# Altium PCB RF-UNIT-QRP_20W.PcbDoc (part 1 of 3)
Units mm, origin at the board's own origin, x right, y up, seen from the top; angles counter-clockwise.
Board outline 187 x 77 mm, 2 copper layers (Top Layer, Top, Bottom Layer, Bottom); 256 components, 173 nets, 766 pads, 3837 vias.
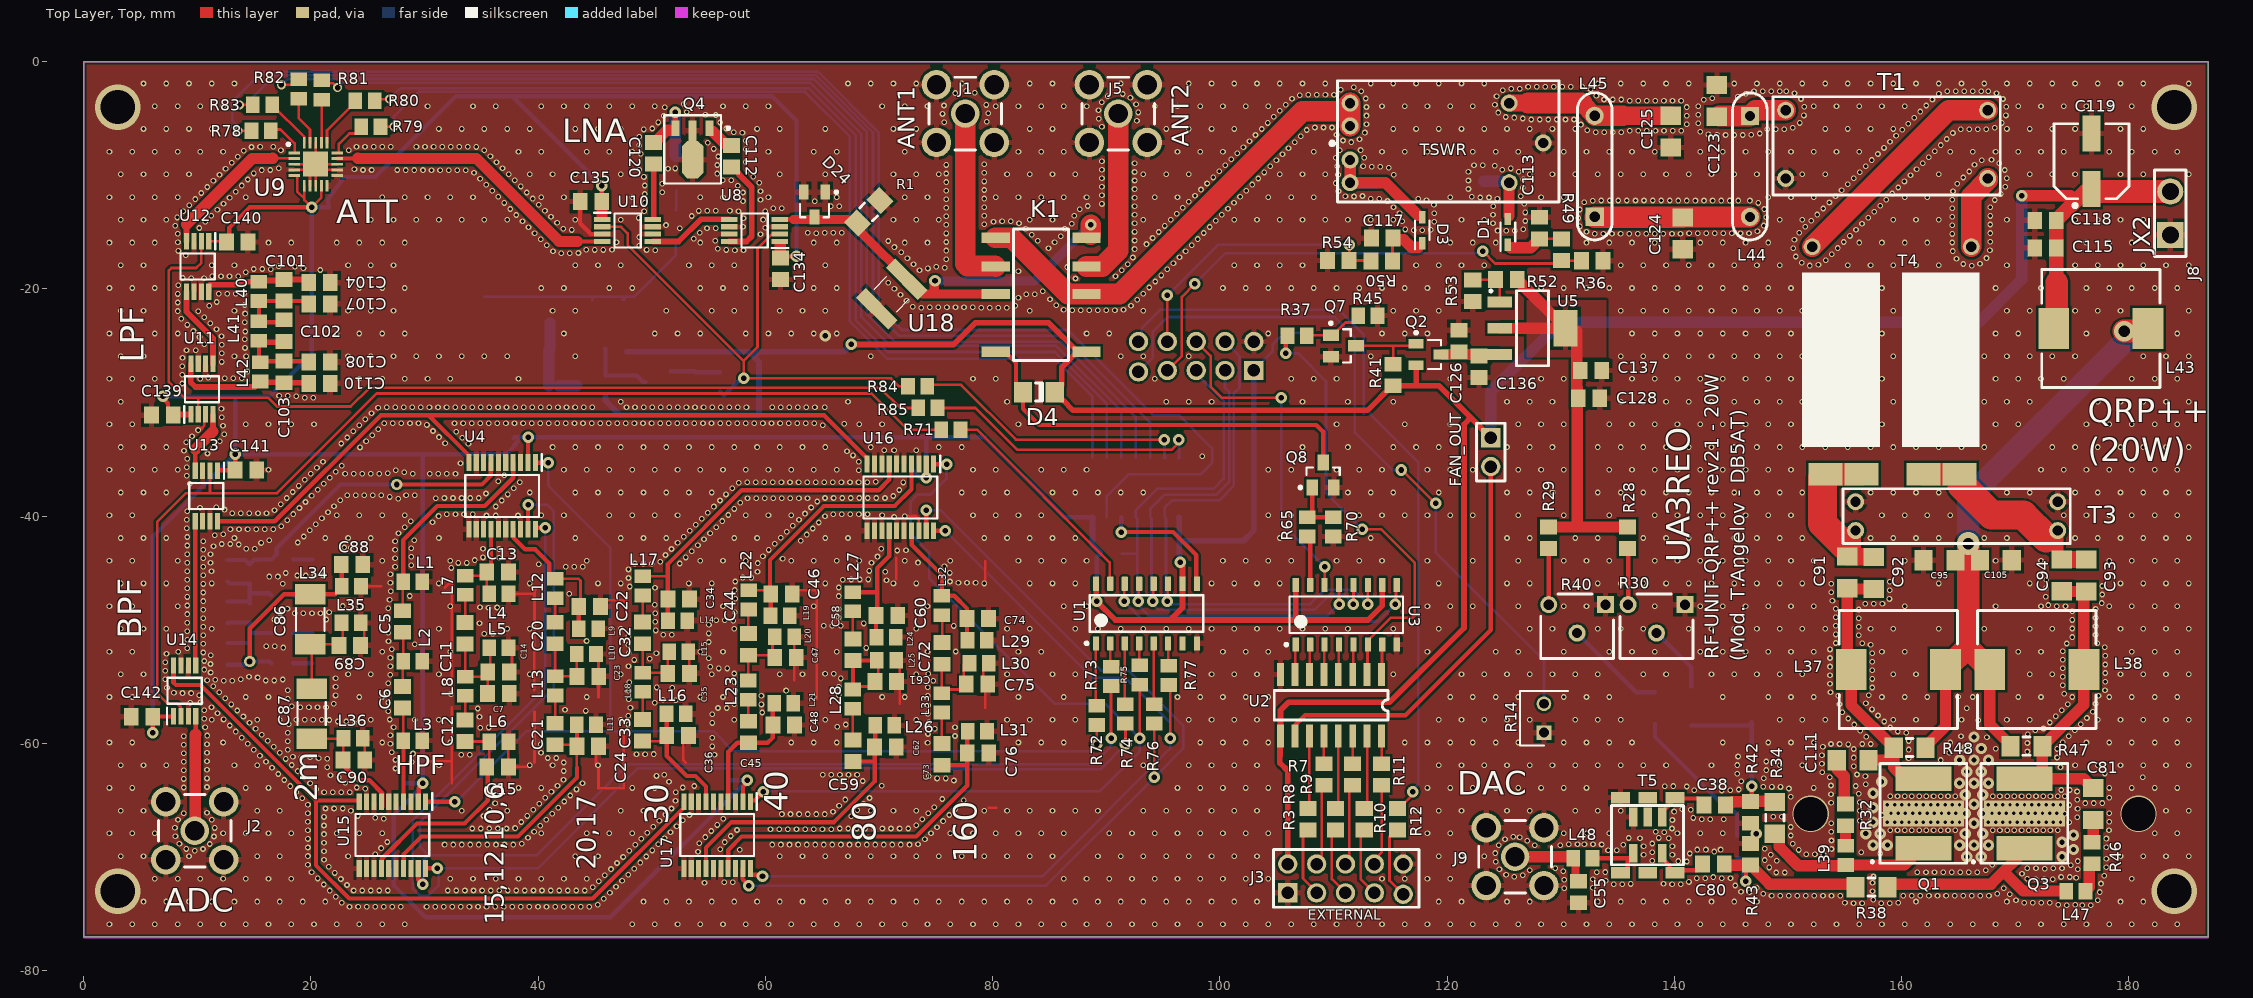
[diagram p0: Top Layer, Top view]
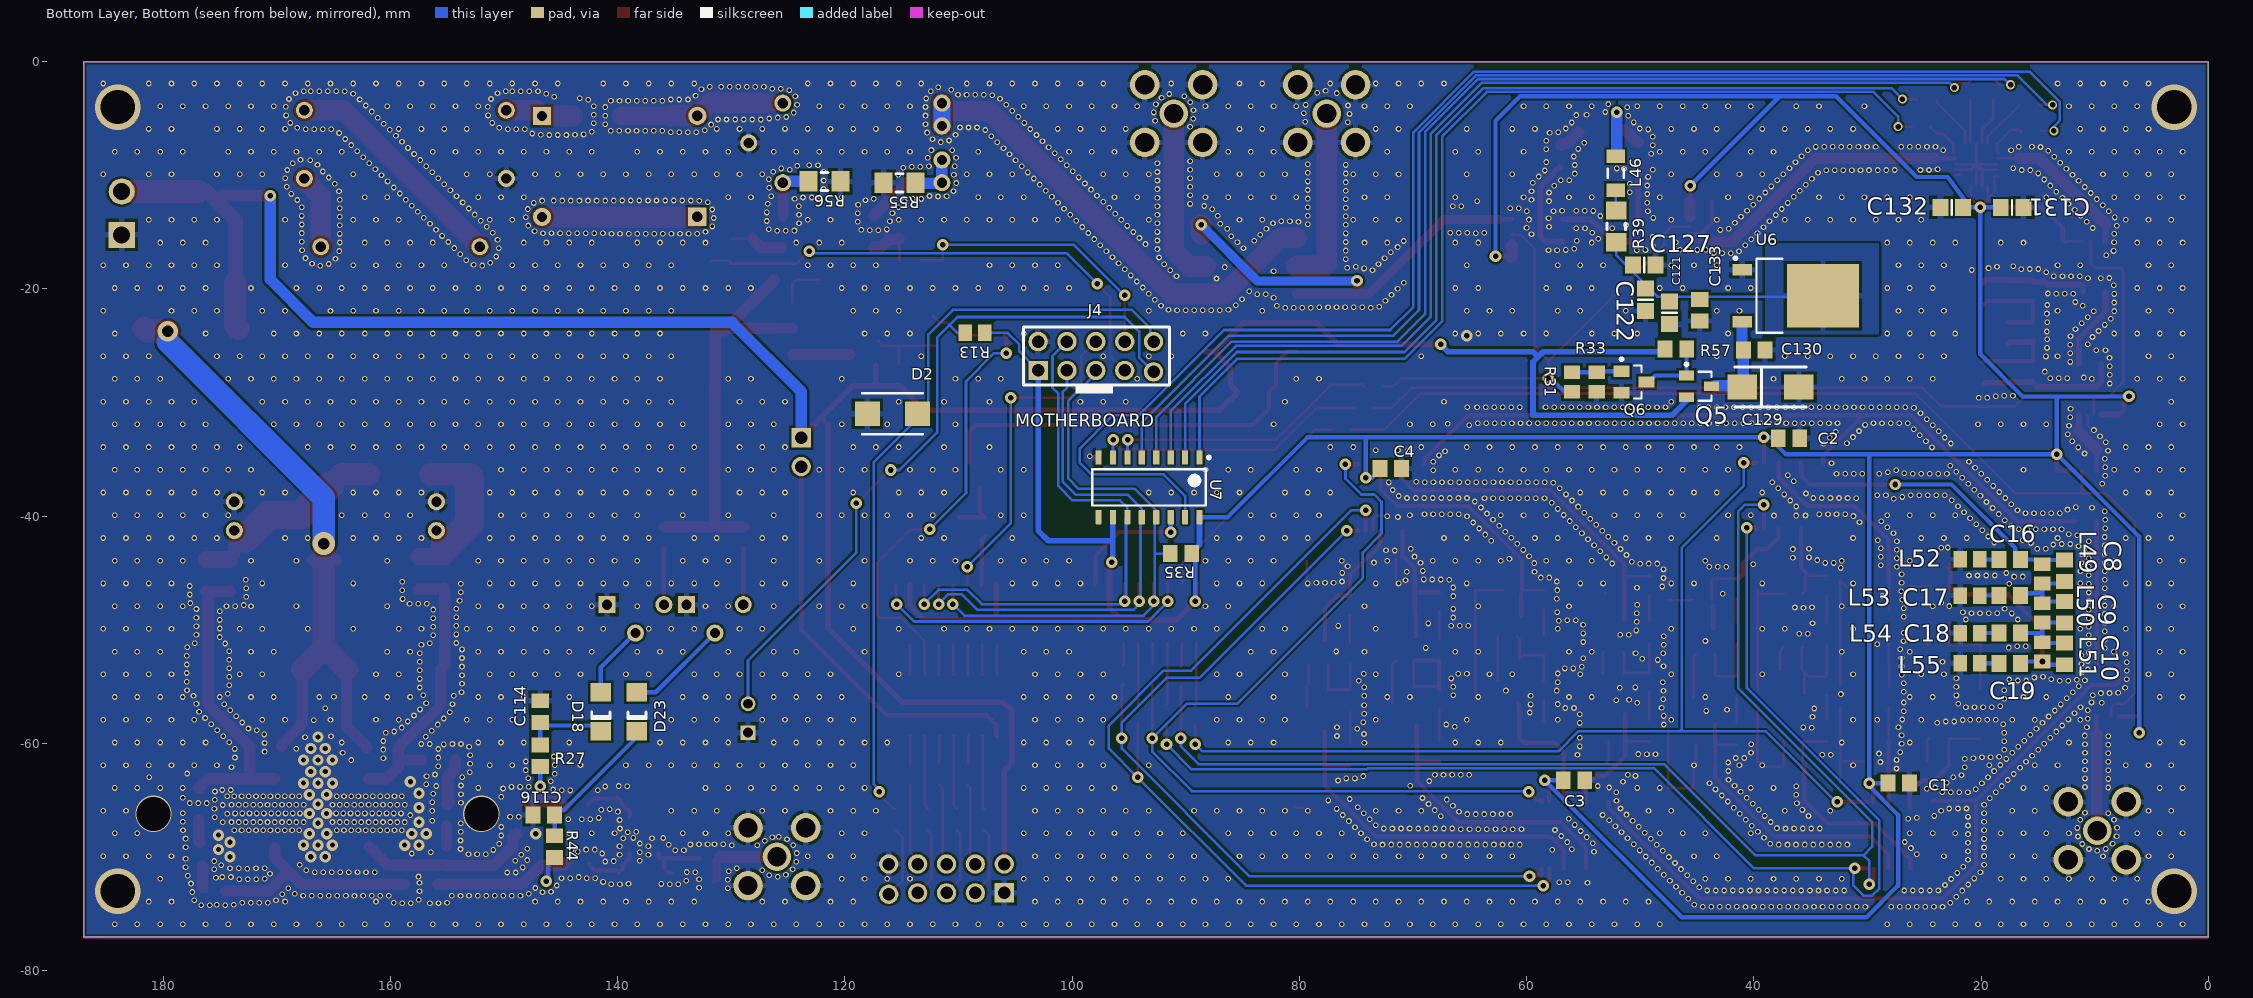
[diagram p1: Bottom Layer, Bottom view, seen from below]

## Layer stack, top to bottom
Top Solder, Top Mask: solder mask 0.0102, Solder Resist, Dk 3.5
Top Layer, Top: signal copper 0.0356
Dielectric 1: dielectric 0.32, FR-4, Dk 4.8
Bottom Layer, Bottom: signal copper 0.0356
Bottom Solder, Bot Mask: solder mask 0.0102, Solder Resist, Dk 3.5

## Board outline
0,-77 187,-77 187,0 0,0

## Design rules (kind name [scope] priority, off if disabled: settings)
BoardOutlineClearance [All] p1: gap=0.2 ignorepadtopadclearanceinfootprint=FALSE except(0.4: Arc-SplitBarrior Arc-SplitContinuation Track-SplitBarrior Track-SplitContinuation SMDPad-SplitBarrior SMDPad-SplitContinuation THPad-SplitBarrior THPad-SplitContinuation Via-SplitBarrior Via-SplitContinuation Fill-SplitBarrior Fill-SplitContinuation Poly-SplitBarrior Poly-SplitContinuation Region-SplitBarrior Region-SplitContinuation Text-SplitBarrior Text-SplitContinuation)
Clearance "Clearance Bottom Layer" [OnLayer('Bottom Layer')] p1: gap=0.203 ignorepadtopadclearanceinfootprint=TRUE except(0.254: Arc-Text Track-Text SMDPad-Text THPad-Text Via-Text Fill-Text Poly-Text Region-Text Text-Text)
Clearance "Clearance Top Layer" [OnLayer('Top Layer')] p2: gap=0.203 ignorepadtopadclearanceinfootprint=TRUE except(0.254: Arc-Text Track-Text SMDPad-Text THPad-Text Via-Text Fill-Text Poly-Text Region-Text Text-Text)
Clearance [All] p3: gap=0.2 ignorepadtopadclearanceinfootprint=FALSE except(0.089: Arc-Arc Arc-Track Arc-SMDPad Track-Track Track-SMDPad SMDPad-SMDPad; 0.127: Arc-Via Track-Via SMDPad-Via THPad-Via Via-Via; 0.254: Arc-Text Track-Text SMDPad-Text THPad-Text Via-Text Fill-Text Poly-Text Region-Text Text-Text)
HoleSize [All] p1: absolutevalues=TRUE maxlimit=6.3 minlimit=0.2 maxpercent=80.000 minpercent=20.000
MinimumAnnularRing [All] p1: minimumring=0.076
MinimumSolderMaskSliver [All] p1: minsoldermaskwidth=0.01
PolygonConnect [HasFootprint('AFT09MS015NT1')] p1: connectstyle=Direct reliefconductorwidth=0.254 reliefentries=4 polygonreliefangle="90 Angle" airgapwidth=0.254
PolygonConnect PolygonConnect_1 [All] p2: thpad.connectstyle=Relief thpad.reliefconductorwidth=0.508 thpad.reliefentries=4 thpad.polygonreliefangle="90 Angle" thpad.airgapwidth=0.254 smdpad.connectstyle=Relief smdpad.reliefconductorwidth=0.508 smdpad.reliefentries=4 smdpad.polygonreliefangle="90 Angle" smdpad.airgapwidth=0.254 via.connectstyle=Direct via.reliefconductorwidth=0.508 via.reliefentries=4 via.polygonreliefangle="90 Angle" via.airgapwidth=0.254
RoutingCorners [All] p1: cornerstyle=Round minsetback=2.54 maxsetback=2.54
RoutingVias [All] p1: holewidth=0.5 width=1 viastyle="Through Hole" minholewidth=0.2 minwidth=0.45 maxholewidth=1 maxwidth=2
SilkToSilkClearance [All] p1: silktosilkclearance=0.01
SilkToSolderMaskClearance [IsPad] p1: minsilkscreentomaskgap=0.01 clearancetoexposedcopper=TRUE
SolderMaskExpansion [All] p1: expansion=0.102 istentingtop=FALSE
Width [All] p1: maxlimit=2.54 minlimit=0.089 preferedwidth=0.381
25 further rules are at their usual default settings.

## Classes and differential pairs
component class "SWR Tandem Match": C113 C117 C123 C124 C125 D1 D3 L44 L45 R36 R49 R50 R54 R55 R56 TSWR
component class RF_AMP: C38 C55 C80 C81 C91 C92 C93 C94 C95 C105 C111 C114 C115 C116 C118 C119 C126 C128 C136 C137 D18 D23 J8 L37 L38 L39 L43 L47 L48 Q1 Q2 Q3 Q7 R27 R28 R29 R30 R32 R34 R37 R38 R40 R41 R42 R43 R44 R45 R46 R47 R48 R52 R53 T1 T3 T4 T5 U5
component class LNA: C101 C102 C103 C104 C107 C108 C110 C112 C120 C121 C122 C127 C129 C130 C131 C132 C133 C134 C135 C139 C140 L40 L41 L42 L46 Q4 Q5 Q6 R31 R33 R39 R57 U6 U8 U9 U10 U11 U12
component class CONTROL: FAN_OUT Q8 R13 R14 R35 R65 R70 R71 R72 R73 R74 R75 R76 R77 R78 R79 R80 R81 R82 R83 R84 R85 U1 U2 U3 U7
component class CONN: D2 D4 D24 J1 J2 J3 J4 J5 J9 K1 R1 R3 R7 R8 R9 R10 R11 R12 U18
component class BPF: C1 C2 C3 C4 C5 C6 C7 C8 C9 C10 C11 C12 C13 C14 C15 C16 C17 C18 C19 C20 C21 C22 C23 C24 C32 C33 C34 C35 C36 C44 C45 C46 C47 C48 C58 C59 C60 C61 C62 C72 C73 C74 C75 C76 C86 C87 C88 C89 C90 C141 C142 L1 L2 L3 L4 L5 L6 L7 L8 L9 L10 L11 L12 L13 L14 L15 L16 L17 L18 L19 L20 L21 L22 L23 L24 L25 L26 L27 L28 L29 L30 L31 L32 L33 L34 L35 L36 L49 L50 L51 L52 L53 L54 L55 U4 U13 U14 U15 U16 U17

## Components (designator, comment, footprint, x,y, rotation, side; value= is the part's Value field where it differs from the comment)
C1 "100n" CAP_0805 27.051,-63.5 r0 bottom
C2 "100n" CAP_0805 36.703,-33.147 r0 bottom
C3 "100n" CAP_0805 55.626,-63.246 r0 bottom
C4 "100n" CAP_0805 71.755,-35.814 r0 bottom
C5 "47p" CAP_0805 28.07,-49.476 r90 top
C6 "33p" CAP_0805 28.07,-56.143 r90 top
C7 "39p" CAP_0805 36.703,-55.626 r180 top
C8 "110p" CAP_0805 12.673,-45.009 r90 bottom
C9 "100p" CAP_0805 12.673,-48.667 r90 bottom
C10 "110p" CAP_0805 12.673,-52.324 r90 bottom
C11 "75p" CAP_0805 33.577,-50.515 r90 top
C12 "61p" CAP_0805 33.577,-59.088 r90 top
C13 "47p" CAP_0805 36.637,-44.915 r180 top
C14 "100p" CAP_0805 36.715,-53.721 r180 top
C15 "120p" CAP_0805 36.637,-62.06 r180 top
C16 "8p" CAP_0805 17.272,-43.815 r0 bottom
C17 "15pF" CAP_0805 17.272,-46.99 r0 bottom
C18 "15p" CAP_0805 17.272,-50.292 r0 bottom
C19 "8p" CAP_0805 17.272,-52.959 r0 bottom
C20 "150p" CAP_0805 41.504,-50.485 r90 top
C21 "120p" CAP_0805 41.504,-59.375 r90 top
C22 "100p" CAP_0805 44.731,-47.943 r180 top
C23 "330p" CAP_0805 44.577,-54.102 r180 top
C24 "270p" CAP_0805 44.564,-60.252 r180 top
C32 "270p" CAP_0805 49.192,-50.479 r90 top
C33 "180p" CAP_0805 49.192,-59.052 r90 top
C34 "180p" CAP_0805 52.57,-47.292 r180 top
C35 "560p" CAP_0805 52.565,-53.85 r180 top
C36 "470p" CAP_0805 52.478,-59.309 r180 top
C38 "100n" CAP_0805 143.764,-65.405 r180 top
C44 "330p" CAP_0805 58.496,-51.49 r90 top
C45 "270p" CAP_0805 58.496,-59.203 r90 top
C46 "330p" CAP_0805 61.622,-46.863 r180 top
C47 "1n" CAP_0805 61.976,-52.451 r180 top
C48 "1n" CAP_0805 61.81,-58.377 r180 top
C55 "27p" CAP_0805 131.572,-73.279 r90 top
C58 "820p" CAP_0805 67.706,-51.955 r90 top
C59 "680p" CAP_0805 67.706,-60.845 r90 top
C60 "470p" CAP_0805 70.893,-48.736 r180 top
C61 "1.5n" CAP_0805 70.793,-54.562 r180 top
C62 "1.2n" CAP_0805 70.766,-60.325 r180 top
C72 "1n" CAP_0805 75.563,-52.282 r90 top
C73 "820p" CAP_0805 75.54,-61.172 r90 top
C74 "1.2n" CAP_0805 78.894,-49.022 r180 top
C75 "3.3n" CAP_0805 78.829,-54.791 r180 top
C76 "3.3n" CAP_0805 78.911,-60.833 r180 top
C80 "100n" CAP_0805 143.637,-70.612 r180 top
C81 "100n" CAP_1206 176.866,-65.341 r90 top
C86 "6.5-30p" 5025[2010] 19.939,-49.081 r90 top
C87 "6.5-30p" 5025[2010] 20.066,-57.377 r90 top
C88 "120p" CAP_0805 23.825,-44.268 r180 top
C89 "100p" CAP_0805 23.622,-51.367 r180 top
C90 "120p" CAP_0805 23.984,-61.463 r180 top
C91 "2.2uF 100V" CAP_1206 155.219,-44.946 r90 top
C92 "1n8 100V" CAP_1206 157.533,-45.008 r90 top
C93 "2.2uF 100V" CAP_1206 176.257,-45.229 r90 top
C94 "1n8 100V" CAP_1206 174.108,-45.213 r90 top
C95 "2.2uF" CAP_1206 163.338,-43.879 r180 top
C101 "39p" CAP_0805 17.653,-20.32 r90 top
C102 "68p" CAP_0805 17.653,-23.876 r90 top
C103 "12p" CAP_0805 17.651,-27.505 r90 top
C104 "27p" CAP_0805 20.955,-19.431 r180 top
C105 "1n8" CAP_1206 168.291,-43.866 r0 top
C107 "51p" CAP_0805 20.955,-21.336 r180 top
C108 "68p" CAP_0805 20.955,-26.416 r180 top
C110 "47p" CAP_0805 20.955,-28.321 r180 top
C111 "100n" CAP_1206 155.702,-61.468 r0 top
C112 "1n" CAP_0805 57.023,-8.128 r270 top
C113 "100n" CAP_0805 128.132,-14.854 r90 top
C114 "100n" CAP_0805 146.812,-57.404 r90 bottom
C115 "1n" CAP_0805 172.466,-16.383 r0 top
C116 "100n" CAP_0805 146.304,-66.294 r0 bottom
C117 "100n" CAP_0805 114.086,-15.533 r0 top
C118 "100n" CAP_0805 172.466,-13.97 r0 top
C119 "47uF 25V" CAPAE_6.6x6.6h5.4 176.721,-8.855 r90 top
C120 "1n" CAP_0805 50.165,-8.255 r90 top
C121 "10n" 6-0805_M 47.416,-22.107 r90 bottom
C122 "1n" 6-0805_M 49.53,-20.955 r90 bottom
C123 "18p" CAP_1206 143.747,-3.45 r270 top
C124 "33p" CAP_1206 140.74,-15.111 r90 top
C125 "18p" CAP_1206 139.689,-6.157 r90 top
C126 "1uF" CAP_0805 121.031,-24.384 r270 top
C127 "100p" 6-0805_M 49.641,-17.907 r0 bottom
C128 "1uF" CAP_0805 132.293,-29.624 r0 top
C129 "10uF 25V" CAPAE_5.3x5.3h6.1 38.536,-28.638 r180 bottom
C130 "100n" CAP_0805 39.77,-25.387 r0 bottom
C131 "100n" 6-0805_M 17.272,-12.827 r0 bottom
C132 "100p" 6-0805_M 22.59,-12.827 r180 bottom
C133 "100n" CAP_0805 44.765,-22.082 r90 bottom
C134 "100n" CAP_0805 61.341,-18.422 r90 top
C135 "100n" CAP_0805 44.45,-12.319 r0 top
C136 "100n" CAP_0805 122.809,-27.051 r90 top
C137 "100n" CAP_0805 132.461,-27.178 r0 top
C139 "100n" CAP_0805 6.731,-31.115 r0 top
C140 "100n" CAP_0805 13.716,-15.875 r180 top
C141 "100n" CAP_0805 14.478,-35.941 r180 top
C142 "100n" CAP_0805 4.941,-57.658 r0 top
D1 "BAT46JFILM" SOD2513X117N 125.349,-14.986 r90 top
D2 "SMAJ5.0A-TR" SMBJ36CATR 115.824,-30.988 r0 bottom
D3 "BAT46JFILM" SOD2513X117N 117.808,-14.839 r90 top
D4 "1N4148" 1N4148 84.074,-29.083 r180 top
D18 "SS14" SS14 141.478,-57.531 r90 bottom
D23 "SS14" SS14 138.303,-57.531 r90 bottom
D24 "BAV99" SOT23 64.323,-12.584 r180 top
FAN_OUT "51022-0200" 51022-0200 124.478,-34.365 r270 top
J1 "ANT1" 31-5431 77.597,-4.572 r180 top
J2 "ADC" 31-5431 9.779,-67.691 r0 top
J3 "EXTERNAL" 90131-0126 109.788,-71.888 r0 top
J4 "MOTHERBOARD" 90131-0126 99.187,-25.908 r180 bottom
J5 "ANT2" 31-5431 91.059,-4.572 r0 top
J8 "JX2" 1986717-2 183.648,-13.338 r90 top value=13.8V
J9 "DAC" 31-5431 125.984,-69.977 r0 top
K1 "Axicom V23079" V23079 84.265,-25.524 r180 top
L1 "270nH" IND_0805 28.966,-45.781 r180 top
L2 "82nH" IND_0805 28.966,-52.766 r180 top
L3 "100nH" IND_0805 28.966,-59.751 r180 top
L4 "470nH" IND_0805 36.537,-46.82 r180 top
L5 "150nH" IND_0805 36.537,-51.583 r180 top
L6 "150nH" IND_0805 36.537,-59.838 r180 top
L7 "270nH" IND_0805 33.577,-46.083 r270 top
L8 "330nH" IND_0805 33.577,-54.973 r270 top
L9 "1uH" IND_0805 44.426,-49.893 r180 top
L10 "330nH" IND_0805 44.239,-52.136 r180 top
L11 "330nH" IND_0805 44.239,-58.347 r180 top
L12 "560nH" IND_0805 41.504,-46.37 r270 top
L13 "820nH" IND_0805 41.504,-54.942 r270 top
L14 "1.5uH" IND_0805 52.285,-49.197 r180 top
L15 "470nH" IND_0805 52.377,-51.945 r180 top
L16 "560nH" IND_0805 52.153,-57.404 r180 top
L17 "1uH" IND_0805 49.192,-46.139 r270 top
L18 "1.5uH" IND_0805 49.192,-54.619 r270 top
L19 "1.8uH" IND_0805 61.297,-48.768 r180 top
L20 "680nH" IND_0805 61.681,-50.612 r180 top
L21 "820nH" IND_0805 61.617,-56.472 r180 top
L22 "2.2uH" IND_0805 58.547,-47.371 r270 top
L23 "2.7uH" IND_0805 58.496,-55.313 r270 top
L24 "4.7uH" IND_0805 70.634,-50.641 r180 top
L25 "1.5uH" IND_0805 70.666,-52.705 r180 top
L26 "1.8uH" IND_0805 70.507,-58.42 r180 top
L27 "2.7uH" IND_0805 67.706,-47.537 r270 top
L28 "3.3uH" IND_0805 67.706,-56.11 r270 top
L29 "5.6uH" IND_0805 78.635,-50.927 r180 top
L30 "2.2uH" IND_0805 78.811,-52.959 r180 top
L31 "2.2uH" IND_0805 78.652,-58.928 r180 top
L32 "6.8uH" IND_0805 75.54,-47.864 r270 top
L33 "8.2uH" IND_0805 75.54,-56.437 r270 top
L34 "8.2nH" IND_0805 23.566,-46.173 r180 top
L35 "8.2nH" IND_0805 23.547,-49.398 r180 top
L36 "8.2nH" IND_0805 23.725,-59.558 r180 top
L37 "10uH" IND_FERRITE_CORE 159.712,-53.496 r0 top
L38 "10uH" IND_FERRITE_CORE 171.898,-53.491 r0 top
L39 "2uH" IND_0805 155.067,-69.85 r90 top
L40 "100nH" IND_0805 15.43,-20.218 r270 top
L41 "82nH" IND_0805 15.43,-23.71 r270 top
L42 "150nH" IND_0805 15.533,-27.305 r270 top
L43 "10uH" IND_FERRITE_CORE 177.535,-23.481 r180 top
L44 "68nH" IND_FERRITE_CORE_1 146.654,-9.22 r270 top
L45 "68nH" IND_FERRITE_CORE_1 132.988,-9.214 r90 top
L46 "220nH" IND_1206 52.157,-9.822 r90 bottom
L47 "2uH" IND_0805 175.331,-72.996 r0 top
L48 "22nH" IND_0805 131.953,-70.104 r0 top
L49 "22nH" IND_0805 14.605,-45.085 r270 bottom
L50 "27nH" IND_0805 14.605,-48.514 r270 bottom
L51 "22nH" IND_0805 14.605,-51.943 r270 bottom
L52 "330nH" IND_0805 20.98,-43.815 r180 bottom
L53 "180nH" IND_0805 20.98,-46.99 r180 bottom
L54 "180nH" IND_0805 20.98,-50.292 r180 bottom
L55 "330nH" IND_0805 20.98,-52.959 r180 bottom
Q1 "AFT09MS015NT1" AFT09MS015NT1 161.925,-66.165 r0 top
Q2 "IRLML9301" SOT23 118.364,-25.781 r270 top
Q3 "AFT09MS015NT1" AFT09MS015NT1 170.815,-66.165 r0 top
Q4 "PGA-103+ / SPF5189Z" SOT89 53.594,-7.239 r180 top
Q5 "IRLML9301" SOT23 44.831,-28.575 r270 bottom
Q6 "BSS123" FAIR-SOT23-3_V 50.546,-28.194 r270 bottom
Q7 "BSS123" FAIR-SOT23-3_V 110.871,-25.019 r270 top
Q8 "BSS123" FAIR-SOT23-3_V 109.089,-36.376 r0 top
R1 "10k" RES_1206 69.088,-13.225 r225 top
R3 "560" RES_0805 107.756,-66.681 r90 top
R7 "560" RES_0805 109.153,-62.744 r90 top
R8 "560" RES_0805 110.169,-66.681 r90 top
R9 "560" RES_0805 111.693,-62.744 r90 top
R10 "560" RES_0805 112.709,-66.681 r90 top
R11 "560" RES_0805 114.233,-62.744 r90 top
R12 "560" RES_0805 115.63,-66.681 r90 top
R13 "2k" RESC2013X60X40NL20T25 108.546,-23.876 r0 bottom
R14 "KTY81/120" TO254P420X460X770-2P 128.524,-59.055 r90 top
R27 "56" RES_0805 146.812,-61.087 r270 bottom
R28 "1k" RES_0805 135.89,-41.91 r90 top
R29 "1k" RES_0805 128.905,-41.91 r90 top
R30 "ADJ-1k" 306J 138.43,-49.692 r270 top value=1k
R31 "1k" RESC2013X60X40NL20T25 56.007,-28.194 r270 bottom
R32 "220" RES_0805 155.067,-66.294 r90 top
R33 "30k" RESC2013X60X40NL20T25 53.848,-28.194 r90 bottom
R34 "0" RES_1206 148.844,-66.548 r270 top
R35 "1k" RES_0805 90.424,-43.307 r0 bottom
R36 "510" RES_0805 132.773,-17.523 r0 top
R37 "10k" RESC2013X60X40NL20T25 106.807,-24.13 r180 top
R38 "0" RES_1206 157.353,-72.644 r0 top
R39 "18" RES_1206 52.111,-14.492 r90 bottom
R40 "ADJ-1k" 306J 131.445,-49.692 r270 top value=1k
R41 "30k" RES_0805 115.259,-27.582 r270 top
R42 "1k" RES_0805 146.703,-66.077 r90 top
R43 "1k" RES_0805 146.7,-69.766 r90 top
R44 "56" RES_0805 145.542,-69.088 r270 bottom
R45 "30k" RESC2013X60X40NL20T25 113.03,-22.352 r180 top
R46 "220" RES_0805 176.765,-69.649 r90 top
R47 "300" RES_1206 170.992,-60.246 r180 top
R48 "300" RES_1206 160.706,-60.371 r180 top
R49 "0" RES_0805 130.078,-16.561 r270 top
R50 "0" RES_0805 114.246,-17.542 r180 top
R52 "200" RES_0805 125.222,-19.177 r180 top
R53 "1.2k" RES_0805 122.258,-20.157 r270 top
R54 "510" RES_0805 110.427,-17.501 r0 top
R55 "50" RES_1206 115.189,-10.668 r0 bottom
R56 "50" RES_1206 121.793,-10.541 r180 bottom
R57 "30k" RES_0805 46.863,-25.273 r0 bottom
R65 "1k" RESC2013X60X40NL20T25 107.692,-40.948 r270 top
R70 "30k" RESC2013X60X40NL20T25 109.978,-40.948 r90 top
R71 "1k" RESC2013X60X40NL20T25 76.327,-32.385 r0 top
R72 "1k" RESC2013X60X40NL20T25 89.154,-57.531 r90 top
R73 "1k" RESC2013X60X40NL20T25 90.424,-54.102 r90 top
R74 "1k" RESC2013X60X40NL20T25 91.694,-57.404 r90 top
R75 "1k" RESC2013X60X40NL20T25 92.964,-53.975 r90 top
R76 "1k" RESC2013X60X40NL20T25 94.234,-57.404 r90 top
R77 "1k" RESC2013X60X40NL20T25 95.504,-54.014 r90 top
R78 "1k" RESC2013X60X40NL20T25 15.621,-6.096 r180 top
R79 "1k" RESC2013X60X40NL20T25 25.273,-5.715 r0 top
R80 "1k" RESC2013X60X40NL20T25 24.765,-3.429 r0 top
R81 "1k" RESC2013X60X40NL20T25 20.955,-2.501 r90 top
R82 "1k" RESC2013X60X40NL20T25 18.923,-2.413 r90 top
R83 "1k" RESC2013X60X40NL20T25 15.748,-3.81 r180 top
R84 "1k" RESC2013X60X40NL20T25 73.406,-28.575 r0 top
R85 "1k" RESC2013X60X40NL20T25 74.295,-30.48 r0 top
T1 "8T M2000HM 10*6*5" "Rutrof 2" 158.686,-7.276 r180 top
T3 "8T M2000HM 10*6*5" Rutrof 164.846,-40.259 r0 top
T4 "TRANSF_OUT" TRANSF_OUT 159.131,-26.289 r0 top
T5 "1:1" TRANSF_ACORE2 137.668,-68.072 r270 top
TSWR "SWR_TANDEM_MATCH" SWR_TANDEM_MATCH 120.111,-7.018 r0 top
U1 "SN74HC595D" D0016A_L 93.539,-48.574 r90 top
U2 "ULN2003BDR" ULN2003BDR 109.788,-56.648 r270 top
U3 "SN74HC595D" D0016A_L 111.125,-48.683 r90 top
U4 "ADG904BRUZ-R" SOP65P640X120-20N 36.83,-38.227 r270 top
U5 "LT1117IST-ADJ" LT1117IST-ADJ 127.524,-23.378 r0 top value=LT1117-ADJ
U6 "LM1117DT-5.0" TO228P991X238-3N 36.322,-20.606 r180 bottom
U7 "SN74HC595D" D0016A_L 93.232,-37.465 r270 bottom
U8 "ADG918BRMZ" SOP65P490X110-8N 59.055,-14.859 r180 top
U9 "PE4312" QFN50P400X400X90-21N 20.422,-9.029 r0 top
U10 "ADG918BRMZ" SOP65P490X110-8N 47.879,-14.859 r0 top
U11 "ADG918BRMZ" SOP65P490X110-8N 10.414,-28.829 r90 top
U12 "ADG918BRMZ" SOP65P490X110-8N 10.033,-18.034 r270 top
U13 "ADG918BRMZ" SOP65P490X110-8N 10.795,-38.227 r270 top
U14 "ADG918BRMZ" SOP65P490X110-8N 8.89,-55.372 r90 top
U15 "ADG904BRUZ-R" SOP65P640X120-20N 27.178,-68.072 r270 top
U16 "ADG904BRUZ-R" SOP65P640X120-20N 71.882,-38.354 r270 top
U17 "ADG904BRUZ-R" SOP65P640X120-20N 55.753,-68.072 r270 top
U18 "2027-07-SM-RPLF" 200307SMRPLF 71.12,-20.447 r225 top

## Footprints (in the part's own frame and the unit in brackets; to place one, negate y for a bottom-side part, rotate by r counter-clockwise, add the part's x,y. Pads: shape width x height; smd on the part's side, far side on the other; paste and mask are expansions set on the pad)
1N4148 [mm]
  rect 1.6x1.8 smd: 1(-1.4,0) 2(1.4,0)
  silkscreen extent -0.3,-0.8 0.3,0.8
6-0805_M [mm] "Chip Resistor, Body 2.0x1.2mm, IPC Low Density"
  rect 1.4x1.5 smd: 1(-1,0) 2(1,0)
  silkscreen extent 0,-0.65 0,0.65, body extent -1.07,-0.7 1.07,0.7, height 0.7
31-5431 [mm]
  round 2.6 hole 1.7: 1(-2.54,-2.54) 2(2.54,-2.54) 3(2.54,2.54) 4(-2.54,2.54)
  round 2.5 hole 1.7: 5(0,0)
  silkscreen extent -3.2,-3.2 3.2,3.2
306J [mm]
  rect 1.5x1.5 hole 0.9: 1(-1.9,2.5)
  round 1.5 hole 0.9: 2(0.6,0) 3(-1.9,-2.5)
  silkscreen extent -2.85,-3.2 2.85,3.2
5025[2010] [mm] "Chip Resistor; Body 5.0 x 2.5 mm (LxW typ)"
  rect 1.8x2.7 smd: 1(-2.2,0) 2(2.2,0)
  silkscreen extent -1,-1.25 1,1.25
51022-0200 [mm]
  rect 1.7x1.7 hole 1.1: 1(-1.27,-0.635)
  round 1.7 hole 1.1: 2(1.27,-0.635)
  silkscreen extent -2.54,-1.91 2.54,0.64
90131-0126 [mm]
  rect 1.7x1.7 hole 1.1: 1(-3.81,-1.27)
  round 1.7 hole 1.1: 2(-3.81,1.27) 3(-1.27,-1.27) 4(-1.27,1.27) 5(1.27,-1.27) 6(1.27,1.27) 7(3.81,-1.27) 8(3.81,1.27) 9(6.35,-1.397) 10(6.35,1.27)
  silkscreen extent -5.08,-2.54 7.75,2.54
200307SMRPLF [mm]
  rect 1.2x4 smd: 1(-1.85,0) 2(1.85,0)
  silkscreen extent -0.8,-1.4 0.8,1.4
1986717-2 [mm]
  rect 2.3x2.3 hole 1.5: 1(-1.905,0)
  round 2.3 hole 1.5: 2(1.905,0)
  silkscreen extent -3.81,-1.4 3.81,1.4
AFT09MS015NT1 [mm]
  rect 4.91x2.16 smd: 1(0,-3.05) 3(0,3.05)
  rect 7.11x2.26 smd: 2(0,0)
  silkscreen extent -4.71,-4.48 3.81,4.38
CAP_0805 [mm]
  rect 1.3x1.5 smd: 1(-0.75,0) 2(1.15,0)
CAP_1206 [mm]
  rect 1.6x1.8 smd: 1(-1.4,0) 2(1.4,0)
CAPAE_5.3x5.3h6.1 [mm]
  rect 2.6x2.2 smd: 1(-2.5,0) 2(2.5,0)
  silkscreen extent -3.15,-1.75 3.15,1.75
CAPAE_6.6x6.6h5.4 [mm]
  rect 3.15x1.6 smd: 1(-2.362,0) 2(2.538,0)
  silkscreen extent -4.11,-3.3 3.39,3.3
D0016A_L [mm] "SOIC, 16-Leads, Body 10x4mm, Pitch 1.27mm, IPC High Density"
  rrect18% 1.25x0.55 smd: 1(-2.625,4.445) 2(-2.625,3.175) 3(-2.625,1.905) 4(-2.625,0.635) 5(-2.625,-0.635) 6(-2.625,-1.905) 7(-2.625,-3.175) 8(-2.625,-4.445) 9(2.625,-4.445) 10(2.625,-3.175) 11(2.625,-1.905) 12(2.625,-0.635) 13(2.625,0.635) 14(2.625,1.905) 15(2.625,3.175) 16(2.625,4.445)
  silkscreen extent -2.75,-5 1.6,5.39, body extent -3,-4.95 3,4.95, height 1.59
FAIR-SOT23-3_V [mm] "SOT23, 3-Leads, Body 2.92x1.3mm, Pitch 0.95mm"
  rect 1x1.4 smd: 1(-0.95,-1.1) 2(0.95,-1.1) 3(0,1.1)
  silkscreen extent -2.12,-1.23 1.46,0.65, body extent -1.46,-0.65 1.46,0.65, height 1.2
IND_0805 [mm]
  rect 1.2x1.45 smd: 1(-0.85,0) 2(0.85,0)
IND_1206 [mm]
  rect 1.2x1.6 smd: 1(-1.5,0) 2(1.5,0)
  silkscreen extent -0.4,-0.7 0.4,0.7
IND_FERRITE_CORE [mm]
  rect 2.7x3.6 smd: 1(-4.15,0) 2(4.15,0)
  silkscreen extent -5.2,-5.2 5.2,5.2
IND_FERRITE_CORE_1 [mm]
  rect 1.6x1.6 hole 0.9: 1(-4.445,0)
  round 1.6 hole 0.9: 2(4.445,0)
  silkscreen extent -6.47,-1.52 6.47,1.52
LT1117IST-ADJ [mm]
  rect 2.15x0.95 smd: 1(-2.9,2.215) 2(-2.9,-0.085) 3(-2.9,-2.385)
  rect 2.15x3.25 smd: 4(2.9,-0.085)
  silkscreen extent -3.86,-3.38 1.4,3.38
QFN50P400X400X90-21N [mm]
  rect 1x0.25 smd: 1(-1.9,1) 2(-1.9,0.5) 3(-1.9,0) 4(-1.9,-0.5) 5(-1.9,-1) 11(1.9,-1) 12(1.9,-0.5) 13(1.9,0) 14(1.9,0.5) 15(1.9,1)
  rect 0.25x1 smd: 6(-1,-1.9) 7(-0.5,-1.9) 8(0,-1.9) 9(0.5,-1.9) 10(1,-1.9) 16(1,1.9) 17(0.5,1.9) 18(0,1.9) 19(-0.5,1.9) 20(-1,1.9)
  rect 2.2x2.2 smd: 21(0,0)
  silkscreen extent -2.52,1.63 -2.27,1.87, body extent -2.05,-2.05 2.05,2.05, height 0.9
RES_0805 [mm]
  rect 1.3x1.5 smd: 1(-0.95,0) 2(0.95,0)
RES_1206 [mm]
  rect 1.6x1.8 smd: 1(-1.4,0) 2(1.4,0)
  silkscreen extent -0.3,-0.8 0.3,0.8
RESC2013X60X40NL20T25 [mm] "Chip Resistor, 2-Leads, Body 2.00x1.25mm, IPC Medium Density"
  rect 1.2x1.45 smd: 1(-0.85,0) 2(0.85,0)
  body extent -1.1,-0.72 1.1,0.72, height 0.6
Rutrof [mm]
  round 1.5 hole 0.9: 1(8.89,-1.016) 2(-8.89,1.524) 3(8.89,1.524) 4(-8.89,-1.016)
  silkscreen extent -10,-2.16 10,2.67
"Rutrof 2" [mm]
  round 1.5 hole 0.9: 1(8.89,-3) 2(-8.89,3) 3(8.89,3) 4(-8.89,-3)
  silkscreen extent -10,-4.19 10,4.45
SMBJ36CATR [mm]
  rect 2.2x2.15 smd: 1(-2.2,0) 2(2.2,0)
  silkscreen extent -2.68,-1.81 2.68,1.81, body extent -3.08,-1.81 3.09,1.81, height 2.75
SOD2513X117N [mm]
  rect 1.085x0.55 smd: 1(-1.14,0) 2(1.14,0)
  silkscreen extent -1.68,-0.64 0.83,0.64, body extent -1.25,-0.64 1.25,0.64, height 1.17
SOP65P490X110-8N [mm]
  rect 1.45x0.45 smd: 1(-2.225,0.975) 2(-2.225,0.325) 3(-2.225,-0.325) 4(-2.225,-0.975) 5(2.225,-0.975) 6(2.225,-0.325) 7(2.225,0.325) 8(2.225,0.975)
  silkscreen extent -2.95,-1.5 1.15,1.55, body extent -2.45,-1.5 2.45,1.5, height 1.1
SOP65P640X120-20N [mm]
  rect 1.475x0.45 smd: 1(-2.938,2.925) 2(-2.938,2.275) 3(-2.938,1.625) 4(-2.938,0.975) 5(-2.938,0.325) 6(-2.938,-0.325) 7(-2.938,-0.975) 8(-2.938,-1.625) 9(-2.938,-2.275) 10(-2.938,-2.925) 11(2.938,-2.925) 12(2.938,-2.275) 13(2.938,-1.625) 14(2.938,-0.975) 15(2.938,-0.325) 16(2.938,0.325) 17(2.938,0.975) 18(2.938,1.625) 19(2.938,2.275) 20(2.938,2.925)
  silkscreen extent -3.67,-3.25 1.85,3.5, body extent -3.2,-3.25 3.2,3.25, height 1.2
SOT23 [mm] "SOT-23; 3 Leads; Body 3.0 x 2.6 mm, inc. leads (LxW max)"
  rect 0.85x1.3 smd: 1(-0.95,-1.1) 2(0.95,-1.1) 3(0,1.1)
  silkscreen extent -2.05,-1.22 1.28,1.1
SOT89 [mm] "SOT-89; Body 4.6 x 4.25 mm, inc. leads (LxW max)"
  oct 1.9x3.3 smd: 0(0,1.388)
  rect 0.7x1.35 smd: 1(-1.5,-1.388) 3(1.5,-1.388)
  rect 0.7x1.8 smd: 2(0,-1.162)
  silkscreen extent -3.28,-2.51 2.5,3.49
SS14 [mm]
  rect 1.6x1.8 smd: 1(-1.4,0) 2(2.032,0)
  silkscreen extent -0.3,-0.8 0.3,0.8
SWR_TANDEM_MATCH [mm]
  round 1.5 hole 0.9: 1(5.355,3.365) 2(-8.645,3.365) 3(5.355,-3.635) 4(-8.645,-3.635) 5(-8.645,1.365) 6(-8.645,-1.635) 7(8.355,-0.135)
  silkscreen extent -9.74,-5.34 9.74,5.34
TO228P991X238-3N [mm]
  rect 1.75x1 smd: 1(-4.7,2.285) 3(-4.7,-2.285)
  rect 6.35x5.55 smd: 4(2.4,0)
  silkscreen extent -5.43,-3.25 -1.15,3.42
TO254P420X460X770-2P [mm]
  rect 1.29x1.29 hole 0.86: 1(0,0)
  round 1.29 hole 0.86: 2(2.54,0)
  silkscreen extent -1.13,-2.1 3.67,2.1, body extent -1.03,-2.1 3.57,2.1, height 7.6
TRANSF_ACORE2 [mm]
  rect 1x1.65 smd: 1(-3.3,2.4) 2(-3.3,0) 3(-3.3,-2.4) 4(3.3,-2.4) 5(3.3,0) 6(3.3,2.4)
  rect 1.65x0.76 smd: 7(-1.59,1.27) 8(-1.59,0) 9(-1.59,-1.27) 10(1.59,1.27) 11(1.59,-1.27)
  silkscreen extent -2.61,-3.21 2.61,3.13
TRANSF_OUT [mm]
  rect 3x2 smd: 1(-5.842,-10.033) 2(2.794,-10.033) 3(-2.667,-10.033) 4(5.969,-10.033)
  round 1.5 hole 0.9: 5(-7,10) 6(7,10)
  silkscreen extent -7.87,-7.62 7.75,7.75
ULN2003BDR [mm]
  rect 2x0.6 smd: 1(-2.7,4.445) 2(-2.7,3.175) 3(-2.7,1.905) 4(-2.7,0.635) 5(-2.7,-0.635) 6(-2.7,-1.905) 7(-2.7,-3.175) 8(-2.7,-4.445) 9(2.7,-4.445) 10(2.7,-3.175) 11(2.7,-1.905) 12(2.7,-0.635) 13(2.7,0.635) 14(2.7,1.905) 15(2.7,3.175) 16(2.7,4.445)
  silkscreen extent -1.3,-5 1.3,5
V23079 [mm]
  rect 2.5x0.9 smd: 1(-4,0) 2(-4,-5.08) 3(-4,-7.49) 4(-4,-10.03) 5(4,-10.03) 6(4,-7.49) 7(4,-5.08) 8(4,0)
  silkscreen extent -2.41,-10.79 2.41,0.76

## Part data
C1 C2 C3 C4 C5 C6 C7 C8 C9 C10 C11 C12 C13 C14 C15 C16 C17 C18 C19 C20 C21 C22 C23 C24 C32 C33 C34 C35 C36 C38 C44 C45 C46 C47 C48 C55 C58 C59 C60 C61 C62 C72 C73 C74 C75 C76 C80 C88 C89 C90 C101 C102 C103 C104 C107 C108 C110 C112 C113 C114 C115 C116 C117 C118 C120 C121 C122 C126 C127 C128 C130 C131 C132 C133 C134 C135 C136 C137 C139 C140 C141 C142: library part CAP_0805, "CAP_0805"
C81 C91 C92 C93 C94 C95 C105 C111 C123 C124 C125: library part CAP_1206, "CAP_1206"
C86 C87: library part CAP_0805, "TZC3P300A110"
C119: library part CAPAE_6.6x6.6h5.4, "CAPAE_6.6x6.6h5.4"
C129: library part CAPAE_5.3x5.3h6.1, "CAPAE_5.3x5.3h6.1"
D1 D3: "Diode", Manufacturer_Name=STMicroelectronics, Mouser Part Number=511-BAT46JFILM, RS Part Number=7146847P, Allied_Number=70389791, Allied Price/Stock=http://www.alliedelec.com/stmicroelectronics-bat46jfilm/70389791/, Datasheet Link=http://www.st.com/web/en/resource/technical/document/datasheet/CD00004930.pdf, Height=1.17mm, Manufacturer_Part_Number=BAT46JFILM, Mouser Price/Stock=https://www.mouser.co.uk/ProductDetail/STMicroelectronics/BAT46JFILM?qs=69%252BgXnvv5lrVjJqgcSQKbQ%3D%3D, RS Price/Stock=http://uk.rs-online.com/web/p/products/7146847P
D2: library part SMLVT3V3, "Diode", Manufacturer_Name=STMicroelectronics, Mouser Part Number=511-SMLVT3V3, RS Part Number=5444821P, Allied_Number=70013736, Allied Price/Stock=http://www.alliedelec.com/stmicroelectronics-smlvt3v3/70013736/, Datasheet Link=http://www.st.com/web/en/resource/technical/document/datasheet/CD00000923.pdf, Height=2.65mm, Manufacturer_Part_Number=SMLVT3V3, Mouser Price/Stock=https://www.mouser.com/Search/Refine.aspx?Keyword=511-SMLVT3V3, RS Price/Stock=http://uk.rs-online.com/web/p/products/5444821P
J1 J2 J5 J9: library part 31-5431, "SMA"
J3 J4: library part 90131-0126, "2*5 PIN"
J8: library part 1986717-2
L1 L2 L3 L4 L5 L6 L7 L8 L9 L10 L11 L12 L13 L14 L15 L16 L17 L18 L19 L20 L21 L22 L23 L24 L25 L26 L27 L28 L29 L30 L31 L32 L33 L34 L35 L36 L39 L40 L41 L42 L47 L48 L49 L50 L51 L52 L53 L54 L55: library part IND_0805, "IND_0805"
L37 L38 L43 L44 L45: library part IND_FERRITE_CORE, "Inductor"
L46: library part IND_1206, "IND_1206"
Q2 Q5: library part MOSFET_ENH_PD, "MOSFET"
Q4: library part PGA-103+
Q6 Q7 Q8: library part CMP-2000-04934-1, "N-Channel Logic Level Enhancement Mode Field Effect Transistor, 1.7 V, -55 to 150 degC, 3-Pin SOT-23, RoHS, Tape and Reel", Manufacturer=Fairchild, Maximum Continuous Drain Current=0.17A, Maximum Drain Source Voltage=100V, Maximum Gate Source Voltage=±20V, Operating Temperature=-55to150degC, Package=3SOT-23, Package Description="3-Pin Small Outline Transistor, Body 2.92 x 1.325 mm, Pitch 0.95 mm", Package Reference=SOT23-3, Package Version="Rev. 12, 03/2016", Category=MOSFET, Channel Mode=Enhancement, Channel Type=N, Datasheet URL=https://www.fairchildsemi.com/datasheets/BS/BSS123.pdf, Datasheet Version=Jun-03, Manufacturer URL=https://www.fairchildsemi.com/, Mounting=SurfaceMount, Package URL=http://www.fairchildsemi.com/dwg/MA/MA03D.pdf, Packaging=Tape&Reel, Rad Hard=No, RDS-on=6000@10VmOhm, Typical Fall Time=2.4ns, Typical Rise Time=9ns, Typical Turn-Off Delay Time=17ns, Typical Turn-On Delay Time=1.7ns
R1 R34 R38 R39 R47 R48 R55 R56: library part RES_1206, "RES_1206"
R3 R7 R8 R9 R10 R11 R12 R27 R28 R29 R32 R35 R36 R41 R42 R43 R44 R46 R49 R50 R52 R53 R54 R57: library part RES_0805, "RES_0805"
R13 R31 R33 R37 R45 R65 R70 R71 R72 R73 R74 R75 R76 R77 R78 R79 R80 R81 R82 R83 R84 R85: library part CMP-2001-00626-1, "RES_0805", Manufacturer=Panasonic, Part Number=ERA-6AEB303V
R14: library part KTY81_110, "Integrated Circuit", Manufacturer_Name=Nexperia, Manufacturer_Part_Number=KTY81/110, Datasheet Link=https://www.nxp.com/docs/en/data-sheet/KTY81_SER.pdf, Height=4.2mm
R30 R40: library part 306J, "306J"
T1 T3: library part TRANSF_ICORE, "Transformer"
T4: library part TRANSF_OUT_2
T5: library part TRANSF_ACORE2
U1 U3 U7: library part CMP-0780-00038-3, "8-Bit Shift Registers With 3-State Output Registers, D0016A, TUBE", F @ Nom Voltage(Max)(Mhz)=28, Generic Part Number=SN74HC595, ICC @ Nom Voltage(Max)(mA)=0.08, Manufacturer="Texas Instruments", Operating Temperature Range(C)="-40 to 85", Rating=Military, tpd @ Nom Voltage(Max)(ns)=34, Voltage(Nom)(V)=6, 3-State Output=Yes, Bits=8, Code_JEDEC="MS-012 variation AC", DatasheetVersion=SCLS041H, Input Type=CMOS, Output Drive (IOL/IOH)(Max)(mA)=7.8/-7.8, Output Type=CMOS, PackageReference=D0016A, PackageVersion=http://www.ti.com/lit/ml/mpds178g/mpds178g.pdf, Technology Family=HC, VCC(Max)(V)=6, VCC(Min)(V)=2
U4 U15 U16 U17: "Integrated Circuit", Manufacturer_Name="Analog Devices", Mouser Part Number=584-ADG904BRUZ-R, RS Part Number=5385019P, Datasheet Link=http://www.analog.com/static/imported-files/data_sheets/ADG904_904R.pdf, Height=1.2mm, Manufacturer_Part_Number=ADG904BRUZ-R, Mouser Price/Stock=https://www.mouser.com/Search/Refine.aspx?Keyword=584-ADG904BRUZ-R, RS Price/Stock=http://uk.rs-online.com/web/p/products/5385019P
U6: library part LM1117DT-ADJ, "Integrated Circuit", Manufacturer_Name="Texas Instruments", Mouser Part Number=926-LM1117DT-ADJ, Datasheet Link=http://www.ti.com/lit/ds/symlink/lm1117-n.pdf, Height=2.38mm, Manufacturer_Part_Number=LM1117DT-ADJ, Mouser Price/Stock=https://www.mouser.com/Search/Refine.aspx?Keyword=926-LM1117DT-ADJ
U8 U10 U11 U12 U13: "Integrated Circuit", Manufacturer_Name="Analog Devices", Mouser Part Number=584-ADG918BRMZ, RS Part Number=4969212P, Datasheet Link=http://www.analog.com/static/imported-files/data_sheets/ADG918_919.pdf, Height=1.1mm, Manufacturer_Part_Number=ADG918BRMZ, Mouser Price/Stock=https://www.mouser.co.uk/ProductDetail/Analog-Devices/ADG918BRMZ?qs=BpaRKvA4VqHrp1TCwMhfnw%3D%3D, RS Price/Stock=http://uk.rs-online.com/web/p/products/4969212P
U9: library part PE4312C-Z, "Integrated Circuit", Manufacturer_Name=pSemi, Mouser Part Number=N/A, Datasheet Link=https://www.psemi.com/pdf/datasheets/pe4312ds.pdf, Height=0.9mm, Manufacturer_Part_Number=PE4312C-Z, Mouser Price/Stock=https://www.mouser.com/Search/Refine.aspx?Keyword=N%2FA
U14: "Integrated Circuit", LCSC Part #=test, Manufacturer_Name="Analog Devices", Mouser Part Number=584-ADG918BRMZ, RS Part Number=4969212P, Datasheet Link=http://www.analog.com/static/imported-files/data_sheets/ADG918_919.pdf, Height=1.1mm, Manufacturer_Part_Number=ADG918BRMZ, Mouser Price/Stock=https://www.mouser.co.uk/ProductDetail/Analog-Devices/ADG918BRMZ?qs=BpaRKvA4VqHrp1TCwMhfnw%3D%3D, RS Price/Stock=http://uk.rs-online.com/web/p/products/4969212P
U18: library part 2003-07-SM-RPLF, Manufacturer_Name=Bourns, Mouser Part Number=652-2003-07-SM-RPLF, Arrow Part Number=2003-07-SM-RPLF, Arrow Price/Stock=https://www.arrow.com/en/products/2003-07-sm-rplf/bourns, Datasheet Link=https://www.arrow.com/en/products/2003-07-sm-rplf/bourns, Height=3.7mm, Manufacturer_Part_Number=2003-07-SM-RPLF, Mouser Price/Stock=https://www.mouser.co.uk/ProductDetail/Bourns/2003-07-SM-RPLF?qs=j%252B1pi9TdxUaYVLyv%2F6mAaA%3D%3D

## Via types
v1: diameter 0.5, hole 0.3, Top Layer, Top to Bottom Layer, Bottom, tented both sides, 3659 vias
v2: diameter 0.5, hole 0.3, Top Layer, Top to Bottom Layer, Bottom, tented bottom, 64 vias
v3: diameter 1.016, hole 0.486, Top Layer, Top to Bottom Layer, Bottom, tented both sides, 62 vias
v4: diameter 1, hole 0.45, Top Layer, Top to Bottom Layer, Bottom, tented both sides, 36 vias
v5: diameter 0.8, hole 0.486, Top Layer, Top to Bottom Layer, Bottom, tented both sides, 6 vias
v6: diameter 4, hole 3, Top Layer, Top to Bottom Layer, Bottom, 4 vias
v7: diameter 1, hole 0.5, Top Layer, Top to Bottom Layer, Bottom, 2 vias
v8: diameter 3.2, hole 3, Top Layer, Top to Bottom Layer, Bottom, 2 vias
v9: diameter 2, hole 1, Top Layer, Top to Bottom Layer, Bottom, tented both sides, 1 vias
v10: diameter 1.8, hole 1, Top Layer, Top to Bottom Layer, Bottom, tented both sides, 1 vias

## Nets (pads, with @x,y where several pads share a name; then routed paths per layer and width w, separated by ;. In a path a pad name is that pad's centre, name@x,y a point inside that pad or via, vN(x,y) a via of type N, cw(c..) or ccw(c..) an arc to the next point about the centre after c; other vN are vias at no path point)
+3V3: C1.2 C2.2 C3.2 C4.2 C131.2 C132.2 C134.2 C135.2 C139.2 C140.2 C141.2 C142.2 J4.1 R13.1 R35.1 U1.10 U1.16 U3.10 U3.16 U4.2 U7.10 U7.16 U8.1 U9.5 U9.6 U9.9 U10.1 U11.1 U12.1 U13.1 U14.1 U15.2 U16.2 U17.2 | length 414.7
  Top Layer, Top w0.23: U12.1@11.008,-15.809 12.5,-15.809 C140.2@12.566,-15.875 ; U9.5@18.522,-10.029 18.786,-10.029 18.796,-10.039 18.796,-11.43 19.422,-12.056 ; U9.6@19.422,-10.929 19.422,-12.056 ; U9.9@20.922,-10.929 20.922,-11.971 v3(20.066,-12.827) 19.422,-12.183 19.422,-12.056
  Top Layer, Top w0.381: v3(6.096,-59.055) 6.096,-57.663 C142.2@6.091,-57.658 6.117,-57.632 7.88,-57.632 U14.1@7.915,-57.597 ; v3(6.985,-29.464) 6.985,-29.636 7.422,-30.073 7.422,-30.655 C139.2@7.881,-31.115 ; U13.1@11.77,-36.002 11.805,-35.967 13.301,-35.967 C141.2@13.328,-35.941 13.335,-35.934 v3(13.335,-34.544) ; C140.2@12.566,-15.875 12.827,-15.614 12.827,-14.605 14.605,-12.827 v3(20.066,-12.827) ; U15.2@29.453,-65.134 29.488,-65.099 29.488,-63.902 29.845,-63.545 v3(29.845,-63.5) v3@29.845,-63.373 ; U4.2@39.116,-35.278 v3(39.116,-33.068) ; v3(45.593,-10.922) 45.593,-12.312 C135.2@45.6,-12.319 ; U17.2@58.028,-65.134 58.028,-63.81 58.42,-63.418 v3(58.42,-63.246) ; C134.2@61.31,-17.241 61.407,-17.145 v3(62.738,-17.145)
  Top Layer, Top w0.5: C139.2@7.881,-31.115 7.942,-31.054 U11.1@9.439,-31.054 ; U1.16@89.094,-45.949 89.124,-45.979 89.124,-47.468 v3(89.154,-47.498) 90.805,-49.149 95.631,-49.149 ; v3(96.52,-44.069) 96.52,-44.209 96.714,-44.403 U1.10@96.714,-45.949 96.714,-48.066 95.631,-49.149 ; U3.16@106.68,-46.058 106.68,-49.149 ; U3.10@114.3,-46.058 114.3,-47.879 113.03,-49.149 106.68,-49.149 ; 95.631,-49.149 106.68,-49.149
  Top Layer, Top w1: C135.2@45.6,-12.319 45.627,-12.346 45.627,-13.609 ; C134.2@61.31,-17.241 61.31,-16.109 ; J4.1@102.743,-27.432 J4.1@102.997,-27.178
  Bottom Layer, Bottom w0.23: J4.1@102.997,-27.178 104.648,-25.527 104.648,-24.902 105.674,-23.876 R13.1@107.696,-23.876
  Bottom Layer, Bottom w0.381: v3(6.096,-59.055) 6.096,-41.783 v3(13.335,-34.544) ; v3(6.985,-29.464) 13.335,-29.464 ; C131.2@18.272,-12.827 v3(20.066,-12.827) ; C1.2@28.201,-63.5 v3(29.845,-63.5) 29.845,-63.754 27.305,-66.294 27.305,-72.517 30.099,-75.311 46.355,-75.311 v3(58.42,-63.246) C3.2@56.776,-63.246 ; v3@29.845,-63.373 29.845,-34.544 ; C2.2@37.853,-33.147 37.932,-33.068 v3(39.116,-33.068) 74.168,-33.068 ; C2.2@38.227,-33.401 37.889,-33.739 38.016,-33.739 37.211,-34.544 29.845,-34.544 ; v3(45.593,-10.922) 37.719,-3.048 ; v3(62.738,-17.145) 62.738,-5.207 60.579,-3.048 37.719,-3.048 ; C4.2@72.905,-35.814 72.905,-35.914 73.618,-36.627 v3@73.718,-36.627 ; v3@73.736,-36.627 v3(74.157,-36.627) 74.157,-33.079 74.168,-33.068 ; U7.16@88.787,-40.09 86.318,-40.09 79.296,-33.068 74.168,-33.068 ; v3(89.154,-47.498) 89.154,-43.627 R35.1@89.474,-43.307 ; v3(13.335,-34.544) 29.845,-34.544 ; v3(13.335,-34.544) 13.335,-29.464 ; 13.335,-29.464 16.352,-29.464 20.066,-25.75 v3(20.066,-12.827) ; v3(20.066,-12.827) C132.2@21.59,-12.827 21.484,-12.142 22.944,-10.147 25.667,-10.147 32.766,-3.048 37.719,-3.048
  Bottom Layer, Bottom w0.5: U7.16@88.787,-40.09 88.787,-42.52 89.474,-43.207 R35.1@89.474,-43.307 ; U7.10@96.407,-40.09 96.432,-40.115 96.432,-43.981 v3(96.52,-44.069) ; 96.548,-42.164 102.108,-42.164 102.997,-41.275 J4.1@102.997,-27.178
+12: C115.2 C118.2 C119.1 D4.1 FAN_OUT.1 J3.2 J8.2 K1.1 L43.2 Q2.2 Q5.2 R41.2 R57.2 U2.9 | length 249.7
  Top Layer, Top w0.5: v3(67.564,-24.892) 76.581,-24.892 78.486,-22.987 84.928,-22.987 K1.1@87.465,-25.524 ; K1.1@88.265,-25.524 K1.1@87.465,-25.524 ; J3.2@105.978,-70.618 105.978,-62.417 105.283,-61.722 105.283,-61.108 105.293,-61.098 105.293,-59.398 U2.9@105.343,-59.348 105.343,-57.09 106.045,-56.388 114.935,-56.388 121.485,-49.838 121.485,-31.931 122.082,-31.334 ; Q2.2@117.277,-26.72 117.277,-28.532 ; FAN_OUT.1@123.843,-33.095 122.082,-31.334 ; K1.1@87.465,-25.524 86.084,-26.906 86.084,-28.473 D4.1@85.474,-29.083 85.474,-29.183 86.084,-29.793 86.184,-29.793 87.085,-30.694 112.997,-30.694 115.159,-28.532 R41.2@115.259,-28.532 117.277,-28.532 ; 117.277,-28.532 119.279,-28.532 122.082,-31.334
  Top Layer, Top w1: v3(170.561,-11.811) 174.879,-11.811
  Top Layer, Top w1.3: 173.616,-19.431 C115.2@173.616,-16.383 C118.2@173.616,-13.97 176.153,-11.433 C119.1@176.937,-11.433
  Top Layer, Top w2: L43.2@173.385,-23.481 173.648,-23.218 173.648,-19.431 ; C119.1@176.937,-11.433 J8.2@183.648,-11.433
  Bottom Layer, Bottom w0.5: Q5.2@45.931,-29.525 45.931,-29.845 47.201,-31.115 59.436,-31.115 59.436,-26.426 58.987,-25.976 ; R57.2@47.813,-25.527 58.537,-25.527 58.987,-25.976 ; v3(67.564,-24.892) 66.929,-25.527 59.436,-25.527 58.987,-25.976
  Bottom Layer, Bottom w1: FAN_OUT.1@123.843,-33.095 123.843,-29.038 129.93,-22.951 166.787,-22.951 170.561,-19.177 v3(170.561,-11.811)
"???? 105": C20.1 C23.2 L10.2 L13.1 | length 6.7
  Top Layer, Top w0.23: C20.1@41.504,-51.235 L13.1@41.504,-54.092 43.357,-54.092 43.409,-54.041 43.409,-52.156 L10.2@43.389,-52.136
AMP_OUT: C123.2 L44.1 T1.1 | length 6.1
  Top Layer, Top w1.83: C123.2@143.947,-4.775 L44.1@146.654,-4.775 147.153,-4.276 T1.1@149.796,-4.276
AMP_PWR: C95.1 C105.1 L37.2 L38.1 L43.1 R47.2 R48.1 | length 58.5
  Top Layer, Top w1: R48.1@162.106,-60.371 162.106,-60.271 163.862,-58.515 L37.2@163.862,-53.496 ; C95.1@164.738,-43.879 164.745,-43.872 166.884,-43.872 C105.1@166.891,-43.866 ; L38.1@167.748,-53.491 167.748,-58.302 169.592,-60.146 R47.2@169.592,-60.246
  Top Layer, Top w2: L37.2@163.862,-53.496 165.862,-51.496 ; v9(165.862,-42.418) 165.862,-51.496 ; L38.1@167.748,-53.491 165.862,-51.604 165.862,-51.496 ; v10(179.584,-23.716) 181.449,-23.716 L43.1@181.685,-23.481
  Bottom Layer, Bottom w1: 179.584,-24.664 v10(179.584,-23.716)
  Bottom Layer, Bottom w2: v9(165.862,-42.418) 165.862,-38.386 179.584,-24.664
ANT1-2: R65.2 U3.15 | length 4.4
  Top Layer, Top w0.381: R65.2@107.692,-41.798 107.95,-42.056 U3.15@107.95,-46.058
ANT1-2_OUT: D4.2 K1.8 Q8.3 | length 36.4
  Top Layer, Top w0.381: K1.8@80.265,-25.524 81.065,-25.524 82.064,-26.524 82.064,-28.473 D4.2@82.674,-29.083 82.674,-30.555 84.104,-31.984 108.493,-31.984 109.089,-32.581 Q8.3@109.089,-35.276
ATT_ON_0.5: R83.1 U9.20 | length 4.5
  Top Layer, Top w0.23: R83.1@16.598,-3.81 19.422,-6.634 U9.20@19.422,-7.129
ATT_ON_1: R82.1 U9.19 | length 4.3
  Top Layer, Top w0.23: R82.1@18.923,-3.263 18.923,-4.98 19.922,-5.979 U9.19@19.922,-7.129
ATT_ON_2: R81.1 U9.17 | length 3.8
  Top Layer, Top w0.23: U9.17@20.922,-7.129 20.955,-7.096 R81.1@20.955,-3.351
ATT_ON_4: R80.1 U9.16 | length 4.7
  Top Layer, Top w0.23: U9.16@21.422,-7.129 21.422,-6.047 23.915,-3.554 R80.1@23.915,-3.429
ATT_ON_8: R79.1 U9.15 | length 3.6
  Top Layer, Top w0.23: U9.15@22.322,-8.029 U9.15@22.521,-8.029 ; U9.15@22.467,-7.964 22.467,-7.251 23.393,-6.325 23.938,-6.325 24.423,-5.84 R79.1@24.423,-5.715
ATT_ON_16: R78.1 U9.1 | length 3.8
  Top Layer, Top w0.23: R78.1@16.471,-6.096 16.471,-6.221 16.723,-5.969 17.326,-5.969 18.563,-7.207 18.563,-8.019 18.553,-8.029 U9.1@18.522,-8.029 U9.1@18.45,-8.029
BAND_OUT_0: R11.2 U2.16 | length 2.4
  Top Layer, Top w0.23: R11.2@114.233,-61.794 U2.16@114.233,-59.348
BAND_OUT_1: R3.2 U2.11 | length 6.4
  Top Layer, Top w0.23: R3.2@107.756,-65.731 107.883,-65.604 U2.11@107.883,-59.348
BAND_OUT_2: R9.2 U2.14 | length 2.4
  Top Layer, Top w0.23: R9.2@111.693,-61.794 U2.14@111.693,-59.348
BAND_OUT_3: R8.2 U2.13 | length 6.5
  Top Layer, Top w0.23: R8.2@110.169,-65.731 110.423,-65.477 U2.13@110.423,-59.348
BPF_1_A0: R74.1 U4.20 U15.20 | length 110.1
  Top Layer, Top w0.23: v3(91.694,-60.071) R74.1@91.694,-58.254
  Top Layer, Top w0.381: U15.20@30.103,-71.01 30.12,-70.993 v3(31.115,-70.993) ; U4.20@39.755,-41.165 39.755,-41.056 39.79,-41.021 v3(40.64,-41.021)
  Bottom Layer, Bottom w0.23: v3(40.64,-41.021) 40.623,-41.038 40.623,-55.135 28.956,-66.802 28.956,-72.771 29.591,-73.406 30.353,-73.406 31.242,-72.517 31.242,-71.12 v3(31.115,-70.993) 40.005,-70.993 48.812,-62.186 73.957,-62.186 74.06,-62.289 89.476,-62.289 v3(91.694,-60.071)
BPF_1_A1: R73.1 U4.19 U15.19 | length 113.8
  Top Layer, Top w0.23: v3(90.424,-59.563) R73.1@90.424,-54.952
  Top Layer, Top w0.381: U15.19@29.453,-71.01 29.459,-71.016 29.459,-72.004 v3(29.845,-72.39) ; U4.19@39.116,-41.154 v3(39.116,-38.989)
  Bottom Layer, Bottom w0.23: v3(29.845,-72.39) 29.845,-70.358 30.353,-69.85 ; v3(39.116,-38.989) 40.767,-38.989 41.39,-39.612 41.39,-55.13 29.591,-66.929 29.591,-69.088 30.353,-69.85 ; v3(90.424,-59.563) 90.424,-60.277 88.852,-61.849 47.879,-61.849 39.878,-69.85 30.353,-69.85
BPF_1_EN: R72.1 U4.1 U15.1 | length 91.4
  Top Layer, Top w0.23: v3(89.154,-60.071) R72.1@89.154,-58.381
  Top Layer, Top w0.381: U15.1@30.103,-65.134 30.12,-65.151 v3(32.655,-65.151) ; U4.1@39.755,-35.289 39.772,-35.306 v3(40.894,-35.306)
  Bottom Layer, Bottom w0.23: v3(32.655,-65.151) 32.766,-65.151 38.989,-58.928 46.482,-58.928 ; v3(40.894,-35.306) 40.894,-37.338 46.355,-42.799 46.355,-58.801 46.482,-58.928 ; v3(89.154,-60.071) 88.519,-60.706 57.212,-60.706 55.434,-58.928 46.482,-58.928
BPF_2_A0: R77.1 U16.20 U17.20 | length 77.1
  Top Layer, Top w0.23: v3(95.631,-59.563) R77.1@95.631,-54.991
  Top Layer, Top w0.381: U17.20@58.678,-71.01 58.678,-71.523 58.713,-71.557 59.433,-71.557 59.576,-71.7 v3(59.748,-71.7) ; U16.20@74.807,-41.292 74.824,-41.275 v3(75.819,-41.275) ; R77.1@95.504,-54.864 R77.1@95.631,-54.991
  Bottom Layer, Bottom w0.23: v3(59.748,-71.7) 84.383,-71.7 95.631,-60.452 v3(95.631,-59.563) 95.631,-58.166 91.694,-54.229 88.773,-54.229 v3(75.819,-41.275)
BPF_2_A1: R76.1 U16.19 U17.19 | length 84
  Top Layer, Top w0.23: v3(94.234,-62.992) R76.1@94.234,-58.254
  Top Layer, Top w0.381: U17.19@58.028,-71.01 57.993,-71.045 57.993,-71.963 v3(58.547,-72.517) ; U16.19@74.157,-41.292 74.163,-41.286 74.163,-39.502 v3(74.168,-39.497)
  Bottom Layer, Bottom w0.23: v3(58.547,-72.517) 58.556,-72.526 84.7,-72.526 v3(94.234,-62.992) 96.774,-60.452 96.774,-58.42 91.948,-53.594 89.535,-53.594 75.438,-39.497 v3(74.168,-39.497)
BPF_2_EN: R75.1 U16.1 U17.1 | length 80.3
  Top Layer, Top w0.23: v3(92.964,-59.563) R75.1@92.964,-54.825
  Top Layer, Top w0.381: U17.1@58.678,-65.134 58.678,-65.06 58.713,-65.025 59.054,-65.025 v3(59.817,-64.262) ; U16.1@74.807,-35.416 74.824,-35.433 v3(75.946,-35.433)
  Bottom Layer, Bottom w0.23: v3(59.817,-64.262) 59.876,-64.203 70,-64.203 70.026,-64.229 70.434,-64.229 70.46,-64.203 89.467,-64.203 92.964,-60.706 v3(92.964,-59.563) 89.916,-56.515 85.471,-56.515 74.422,-45.466 74.422,-43.18 72.771,-41.529 72.771,-38.735 73.406,-38.1 74.549,-38.1 75.946,-36.703 v3(75.946,-35.433)
BPF_ON: R71.1 U13.2 U14.2 | length 95.4
  Top Layer, Top w0.23: U14.2@8.565,-57.597 8.53,-57.562 8.53,-56.79 8.255,-56.515 7.408,-56.515 6.477,-55.584 6.477,-40.513 9.017,-37.973 11.176,-37.973 ; U13.2@11.12,-36.002 11.12,-37.917 11.176,-37.973 ; R71.1@75.477,-32.385 72.517,-32.385 69.342,-29.21 25.781,-29.21 17.018,-37.973 11.176,-37.973
CTRL_CLK: J4.4 U1.11 U3.11 U7.11 | length 50.7
  Top Layer, Top w0.23: v3(95.377,-47.498) 95.41,-47.465 95.41,-45.982 U1.11@95.444,-45.949 ; v3(113.03,-47.752) U3.11@113.03,-46.058
  Bottom Layer, Bottom w0.23: J4.4@100.457,-24.638 101.727,-25.908 101.727,-28.702 101.219,-29.21 101.219,-37.338 99.949,-38.608 95.779,-38.608 95.137,-39.25 U7.11@95.137,-40.09 95.257,-40.21 95.257,-47.378 v3(95.377,-47.498) 95.631,-47.752 107.95,-47.752 109.22,-46.482 111.76,-46.482 v3(113.03,-47.752)
CTRL_DATA: J4.6 U3.14 | length 29.2
  Top Layer, Top w0.23: J4.6@97.917,-24.638 99.186,-25.907 99.186,-28.574 100.203,-29.591 v3(105.41,-29.591) ; U3.14@109.22,-46.058 v3(109.22,-44.45)
  Bottom Layer, Bottom w0.23: v3(105.41,-29.591) 105.41,-40.64 v3(109.22,-44.45)
CTRL_OE: J4.5 R35.2 U1.13 U3.13 U7.13 | length 51
  Top Layer, Top w0.23: v3(92.837,-47.498) 92.87,-47.465 92.87,-45.982 U1.13@92.904,-45.949 ; v3(110.49,-47.752) U3.13@110.49,-46.058
  Bottom Layer, Bottom w0.23: R35.2@91.374,-43.307 92.717,-43.307 ; J4.5@98.044,-27.051 98.044,-27.559 100.33,-29.845 100.33,-36.703 99.441,-37.592 94.488,-37.592 92.597,-39.483 U7.13@92.597,-40.09 92.717,-40.21 92.717,-43.307 ; v3(110.49,-47.752) 109.482,-48.76 93.718,-48.76 92.837,-47.879 v3(92.837,-47.498) 92.717,-47.378 92.717,-43.307
CTRL_RCLK: J4.3 U1.12 U3.12 U7.12 | length 48.5
  Top Layer, Top w0.23: v3(94.107,-47.498) 94.14,-47.465 94.14,-45.982 U1.12@94.174,-45.949 ; v3(111.76,-47.752) U3.12@111.76,-46.058
  Bottom Layer, Bottom w0.23: J4.3@100.457,-27.178 100.457,-28.702 100.838,-29.083 100.838,-36.957 99.687,-38.108 95.115,-38.108 93.867,-39.356 U7.12@93.867,-40.09 93.987,-40.21 93.987,-47.378 v3(94.107,-47.498) 94.107,-47.752 94.603,-48.248 108.343,-48.248 109.728,-46.863 110.871,-46.863 v3(111.76,-47.752)
FAN_OUT: FAN_OUT.2 U2.10 | length 36
  Top Layer, Top w0.381: U2.10@106.613,-59.348 106.688,-59.272 106.688,-58.34 107.497,-57.531 116.332,-57.531 123.843,-50.02 FAN_OUT.2@123.843,-35.635
GND: C1.1 C2.1 C3.1 C4.1 C7.1 C13.1 C14.1 C15.1 C22.1 C23.1 C24.1 C34.1 C35.1 C36.1 C46.1 C47.1 C48.1 C55.1 C60.1 C61.1 C62.1 C74.1 C75.1 C76.1 C88.1 C89.1 C90.1 C95.2 C104.1 C105.2 C107.1 C108.1 C110.1 C113.2 C114.2 C115.1 C116.2 C117.1 C118.1 C119.2 C121.1 C122.1 C123.1 C124.1 C125.1 C126.1 C127.1 C128.2 C129.2 C130.1 C131.1 C132.1 C133.1 C134.1 C135.1 C136.1 C137.2 C139.1 C140.1 C141.1 C142.1 D2.2 D24.1 D24.2 J1.1 J1.2 J1.3 J1.4 J2.1 J2.2 J2.3 J2.4 J3.1 J3.10 J4.2 J5.1 J5.2 J5.3 J5.4 J8.1 J9.1 J9.2 J9.3 J9.4 L1.1 L2.1 L3.1 L4.1 L5.1 L6.1 L9.1 L10.1 L11.1 L14.1 L15.1 L16.1 L19.1 L20.1 L21.1 L24.1 L25.1 L26.1 L29.1 L30.1 L31.1 L34.1 L35.1 L36.1 L52.1 L53.1 L54.1 L55.1 Q1.2 Q3.2 Q4.0 Q4.2 Q6.2 Q7.2 Q8.2 R1.1 R14.1 R30.1 R33.1 R36.2 R40.1 R42.1 R43.2 R45.1 R53.2 R54.1 R55.2 R56.2 R70.1 T1.3 T3.2 T3.3 T5.3 T5.9 TSWR.7 U1.8 U2.8 U3.8 U4.3 U4.5 U4.6 U4.8 U4.9 U4.11 U4.12 U4.13 U4.15 U4.16 U4.18 U6.1 U7.8 U8.3 U8.6 U8.7 U9.3 U9.4 U9.7 U9.8 U9.10 U9.11 U9.12 U9.13 U9.18 U9.21 U10.3 U10.6 U10.7 U11.3 U11.6 U11.7 U12.3 U12.6 U12.7 U13.3 U13.6 U13.7 U14.3 U14.6 U14.7 U15.3 U15.5 U15.6 U15.8 U15.9 U15.11 U15.12 U15.13 U15.15 U15.16 U15.18 U16.3 U16.5 U16.6 U16.8 U16.9 U16.11 U16.12 U16.13 U16.15 U16.16 U16.18 U17.3 U17.5 U17.6 U17.8 U17.9 U17.11 U17.12 U17.13 U17.15 U17.16 U17.18 U18.2 | length 117.8
  Top Layer, Top w0.23: v1(10.069,-32.425) 10.142,-32.425 10.309,-32.258 10.414,-32.258 10.629,-32.043 10.629,-31.164 U11.3@10.739,-31.054 ; U9.4@18.522,-9.529 19.922,-9.529 U9.7@19.922,-10.929 ; U9.3@18.522,-9.029 U9.21@20.422,-9.029 ; U9.8@20.422,-10.929 U9.21@20.422,-9.029 ; U9.18@20.422,-7.129 U9.21@20.422,-9.029 ; U9.21@20.922,-9.529 U9.12@22.322,-9.529 ; U9.11@21.902,-9.964 U9.11@22.257,-9.964 ; U9.13@22.322,-9.029 U9.21@20.422,-9.029 ; L35.1@24.397,-49.398 24.709,-49.711 C89.1@24.709,-51.303 ; L34.1@24.416,-46.173 26.208,-46.173 ; L36.1@24.575,-59.558 24.733,-59.717 C90.1@24.733,-61.463 ; 30.321,-61.59 32.39,-61.59 ; 31.796,-46.3 32.385,-45.71 32.385,-47.615 32.39,-47.62 32.39,-54.918 32.385,-54.923 ; 32.385,-56.823 32.39,-56.828 32.39,-61.59 ; 32.39,-63.495 32.39,-61.59 ; L6.1@37.387,-59.838 C15.1@37.387,-62.06 v1@39.297,-62.06 ; L5.1@37.387,-51.583 37.699,-51.895 C14.1@37.699,-53.488 ; L4.1@37.387,-46.82 37.392,-46.815 39.419,-46.815 ; 39.673,-57.229 39.678,-57.234 39.678,-61.679 ; 39.673,-55.329 39.673,-49.937 39.678,-49.932 39.678,-46.556 39.8,-46.434 ; C24.1@45.089,-60.125 45.089,-61.805 45.314,-62.03 45.314,-63.935 47.541,-63.935 47.541,-58.855 47.536,-58.85 ; L10.1@45.089,-52.136 45.309,-52.356 45.309,-55.946 ; C22.1@45.426,-47.311 45.509,-47.394 47.652,-47.394 47.541,-47.504 ; 47.536,-50.989 47.541,-50.984 ; C36.1@52.777,-59.802 52.777,-61.481 53.002,-61.707 ; C34.1@53.135,-46.784 C34.1@53.14,-46.779 ; L15.1@53.227,-51.945 53.315,-52.033 C35.1@53.315,-53.85 ; C46.1@62.081,-46.525 62.085,-46.52 64.528,-46.52 64.533,-46.525 64.533,-50.018 64.528,-50.023 64.528,-56.05 ; 62.526,-54.422 62.526,-50.617 L20.1@62.531,-50.612 ; L25.1@71.516,-52.705 71.828,-53.017 71.828,-56.515 ; 71.516,-45.561 71.516,-43.656 ; v1(72.263,-40.005) 72.295,-39.973 73.247,-39.973 73.507,-40.233 U16.18@73.507,-41.292 ; L30.1@79.191,-53.032 79.191,-54.783 79.345,-54.937 79.345,-56.842 ; v1@79.35,-45.888 79.35,-43.983 ; 79.661,-65.659 80.335,-65.659
  Top Layer, Top w0.381: U9.21@19.922,-9.529 U9.21@20.422,-9.029 U9.21@20.922,-9.529 ; C135.1@43.7,-12.319 43.688,-12.331 43.688,-14.224 44.648,-15.184 U10.3@45.654,-15.184